# EAGLE board Tema_TSC (EAGLE 9.7.0)
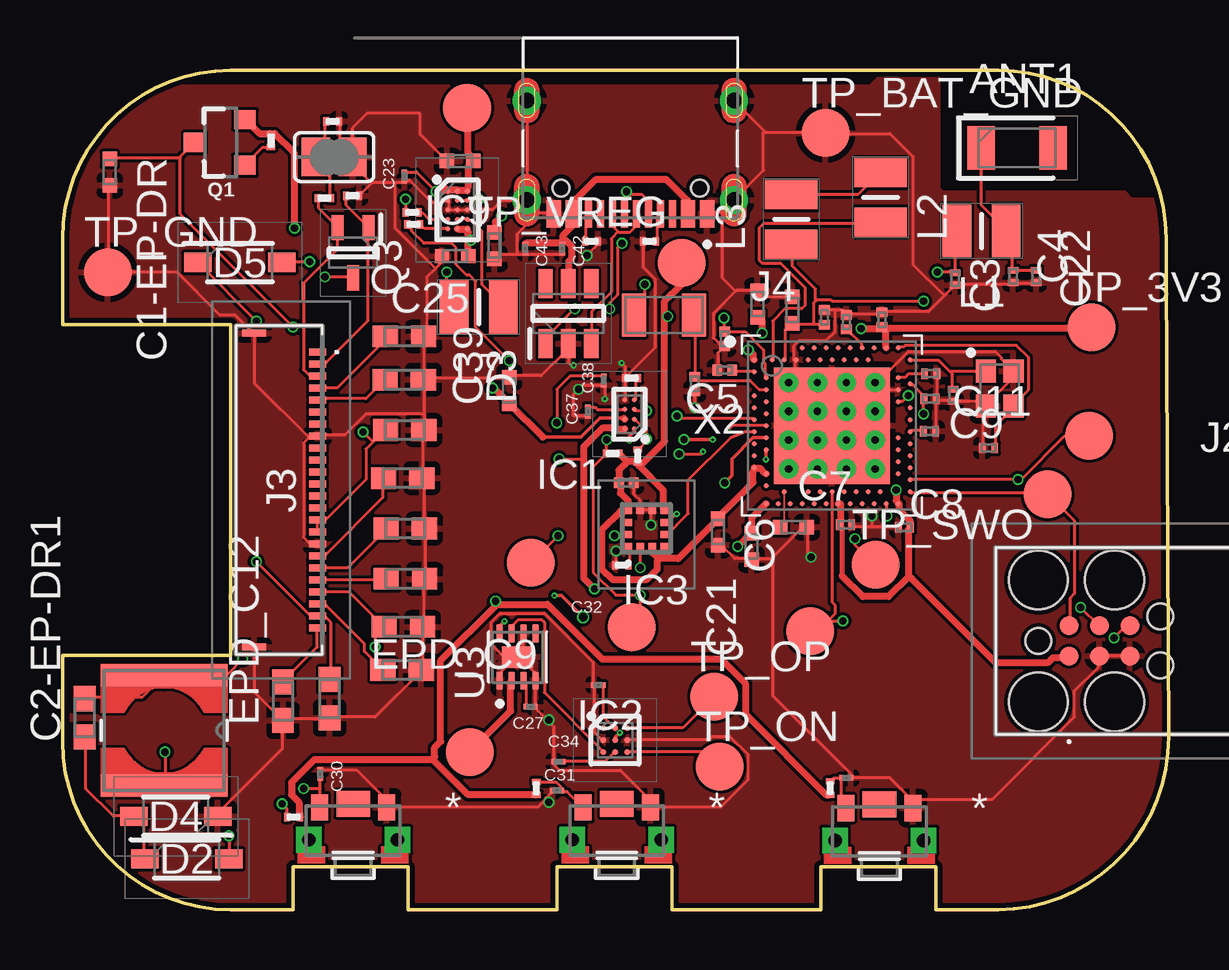
[diagram p0: board, top side]
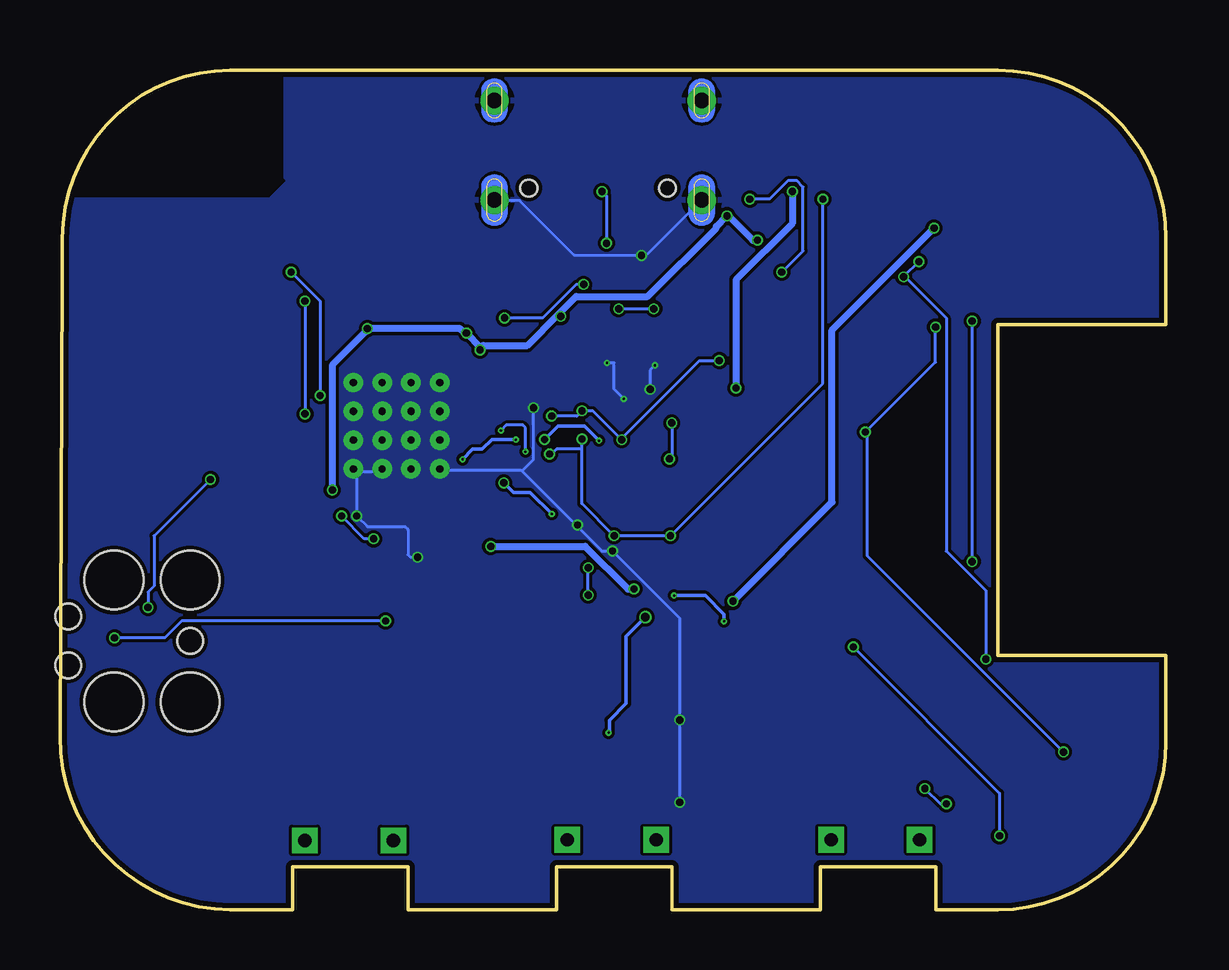
[diagram p1: board, bottom side, seen from below]

Size 46.1 x 35 mm. Coordinates in mm from the lower left corner, seen from the top.
Outline: 0,10.6 0,7 arc90 7,0 9.6,0 9.6,1.8 14.4,1.8 14.4,0 20.6,0 20.6,1.8 25.4,1.8 25.4,0 31.6,0 31.6,1.8 36.4,1.8 36.4,0 39,0 arc90 46.1,7.2 46,26.5 46,28 arc90 39,35 7,35 arc90 0,28 0,24.4 7,24.4 7,10.6 0,10.6
Copper layers (1*16): Top 0.035mm / dielectric 1.6mm / Bottom 0.035mm
Design rules "jlcpcb-2layers.dru *": minimum track width 5mil, minimum drill 0.3mm, track to track 5mil, track to pad 5mil, pad to pad 5mil, via to via 5mil, smd to smd 5mil, copper to edge 0.2mm, drill to drill 6mil, minimum pad ring 10mil, minimum via ring 3mil, stop-mask expansion 4mil, vias tented up to drill 0mil, thermal gap 10mil
Net classes: 1 traseedeputere: width 0.3 mm

## Footprints (pad centres in the part's own frame; a part is rotated, then mirrored left to right if it is on the bottom)
2450AT18B100E_ANTC3216X140N = smd 1.15 x 1.8: 1 -1.5,0; 2 1.5,0
NORDIC_NRF_3_RESC0201_L = smd 0.28 x 0.43: 1 -0.255,0; 2 0.255,0
NORDIC_NRF_3_RESC0402_N = smd 0.6 x 0.6: 1 -0.55,0; 2 0.55,0
NORDIC_NRF_3_RESC0603_N = smd 1.05 x 0.9: 1 -0.8,0; 2 0.8,0
NORDIC_NRF_3_RESC0201_N = smd 0.4 x 0.45: 1 -0.305,0; 2 0.305,0
GRM011R60J152KE01L_2_CAPC0201X13N = smd 0.22 x 0.23: 1 -0.185,0; 2 0.185,0
ESP32_C6_LIBRARY_5_SOD3716X135N = smd 1.15 x 0.8: 1 -1.75,0; 2 1.75,0
ESP32_C6_LIBRARY_3_SOT95P280X145-6N = smd 1.2 x 0.6: 1 -1.25,0.95; 2 -1.25,0; 3 -1.25,-0.95; 4 1.25,-0.95; 5 1.25,0; 6 1.25,0.95
BQ25180YBGR_BGA8C40P2X4_100X155X50 = smd 0.2 x 0.2: A1 -0.2,0.6; A2 0.2,0.6; B1 -0.2,0.2; B2 0.2,0.2; C1 -0.2,-0.2; C2 0.2,-0.2; D1 -0.2,-0.6; D2 0.2,-0.6
DRV2605YZFR_BGA9C50P3X3_144X144X62 = smd 0.25 x 0.25: A1 -0.5,0.5; A2 0,0.5; A3 0.5,0.5; B1 -0.5,0; B2 0,0; B3 0.5,0; C1 -0.5,-0.5; C2 0,-0.5; C3 0.5,-0.5
BMA423_BMA423 = smd 0.3 x 0.35: 1 -0.75,-0.775; 2 -0.25,-0.775; 3 0.25,-0.775; 4 0.75,-0.775; 7 0.75,0.775; 8 0.25,0.775; 9 -0.25,0.775; 10 -0.75,0.775 | smd 0.35 x 0.3: 5 0.775,-0.25; 6 0.775,0.25; 11 -0.775,0.25; 12 -0.775,-0.25
RT6160AWSC_BGA15C40P3X5_140X230X60 = smd 0.216 x 0.216: A1 -0.4,0.8; A2 0,0.8; A3 0.4,0.8; B1 -0.4,0.4; B2 0,0.4; B3 0.4,0.4; C1 -0.4,0; C2 0,0; C3 0.4,0; D1 -0.4,-0.4; D2 0,-0.4; D3 0.4,-0.4; E1 -0.4,-0.8; E2 0,-0.8; E3 0.4,-0.8
TC2030-IDC_TC2030IDC = smd 0.783 x 0.783: 1 -0.953,-0.635; 2 -0.953,0.635; 3 0.317,-0.635; 4 0.317,0.635; 5 1.588,-0.635; 6 1.588,0.635 | hole 2.451: -2.223,-2.54; -2.223,2.54; 0.952,-2.54; 0.952,2.54 | hole 1.067: -2.223,0; 2.857,-1.016; 2.857,1.016
503480-2400_5034802400 = smd 0.3 x 0.7: 1 -5.75,1.525; 2 -5.25,1.525; 3 -4.75,1.525; 4 -4.25,1.525; 5 -3.75,1.525; 6 -3.25,1.525; 7 -2.75,1.525; 8 -2.25,1.525; 9 -1.75,1.525; 10 -1.25,1.525; 11 -0.75,1.525; 12 -0.25,1.525; 13 0.25,1.525; 14 0.75,1.525; 15 1.25,1.525; 16 1.75,1.525; 17 2.25,1.525; 18 2.75,1.525; 19 3.25,1.525; 20 3.75,1.525; 21 4.25,1.525; 22 4.75,1.525; 23 5.25,1.525; 24 5.75,1.525 | smd 0.3 x 1: MP1 -6.54,-1.125; MP2 6.54,-1.125
KH-TYPE-C-16P_KINGHELM_KH-TYPE-C-16P = smd 0.6 x 1.15: A1_B12 -3.2,4.725; A4_B9 -2.4,4.725; A9_B4 2.4,4.725; A12_B1 3.2,4.725 | smd 0.3 x 1.15: A5 -1.25,4.725; A6 -0.25,4.725; A7 0.25,4.725; A8 1.25,4.725; B5 1.75,4.725; B6 0.75,4.725; B7 -0.75,4.725; B8 -1.75,4.725 | drill 0.65 pad 1.05: SH1 -4.32,0; SH2 4.32,0; SH3 -4.32,4.15; SH4 4.32,4.15 | hole 0.7: -2.89,3.65; 2.89,3.65
MLP2016SR47MT0S1_INDC2016X100N = smd 1.2 x 2.2: 1 -1.028,0; 2 1.028,0
ESP32_C6_LIBRARY_2_IND_4828-WE-TPC_WRE = smd 0.9 x 5.3: 1 -2.286,0; 2 2.286,0
ESP32_C6_LIBRARY_4_ESP32_C6_LIBRARY_4_ESP32_C6_LIBRARY_4_ESP32_C6_LIBRARY_4_ESP32_WROVER_SPARKFUN-DISCRETESEMI_SOT23-3 = smd 0.8 x 0.9: 1 -0.95,-1; 2 0.95,-1; 3 0,1.1
ESP32_C6_LIBRARY_6_SOT65P210X110-3N = smd 1.05 x 0.5: 1 -1.05,0.65; 2 -1.05,-0.65; 3 1.05,0
CPF0201D7K68C1_0201 = smd 0.35 x 0.25: 1 0,0.275; 2 0,-0.275
ERA-1AEB3401C_0201 = smd 0.35 x 0.25: 1 0,0.275; 2 0,-0.275
ESP32_C6_LIBRARY_7_JUMPER_SJ = smd 1.168 x 1.6: 1 -0.762,0; 2 0.762,0
2025-10-22_07-23-44_LIBRARY_SW_EVP-AKE31A_PAN = smd 0.711 x 1.092: 1 -1.4,-0.972; 2 1.4,-0.972 | drill 0.559 pad 0.914 square: 3 -1.848,0.381; 4 1.848,0.381 | smd 1.397 x 1.092: 5 0,-1.124
HECTOR_WATCH_1_TP20R = smd 2 x 2: TP 0,0
ESP32_C6_LIBRARY_SON50P200X200X80-9N = smd 0.76 x 0.27: 1 -0.985,0.75; 2 -0.985,0.25; 3 -0.985,-0.25; 4 -0.985,-0.75; 5 0.985,-0.75; 6 0.985,-0.25; 7 0.985,0.25; 8 0.985,0.75 | smd 0.9 x 1.3: 9 0,0
NORDIC_NRF_4_AQFN50P700X700X85_HS-74N = smd 4.85 x 4.85: P$74 0,0 | drill 0.3 pad 0.6: P$75 -1.8,1.8; P$76 -0.6,1.8; P$77 0.6,1.8; P$78 1.8,1.8; P$79 -1.8,0.6; P$80 -0.6,0.6; P$81 0.6,0.6; P$82 1.8,0.6; P$83 -1.8,-0.6; P$84 -0.6,-0.6; P$85 0.6,-0.6; P$86 1.8,-0.6; P$87 -1.8,-1.8; P$88 -0.6,-1.8; P$89 0.6,-1.8; P$90 1.8,-1.8 | smd 0.2 x 0.2: P$A8 -1.25,3.25; P$A10 -0.75,3.25; P$A12 -0.25,3.25; P$A14 0.25,3.25; P$A16 0.75,3.25; P$A18 1.25,3.25; P$A20 1.75,3.25; P$A22 2.25,3.25; P$A23 2.75,3.25; P$AA24 3.25,-2.25; P$AB2 -2.75,-2.5; P$AC5 -2,-2.75; P$AC9 -1,-2.75; P$AC11 -0.5,-2.75; P$AC13 0,-2.75; P$AC15 0.5,-2.75; P$AC17 1,-2.75; P$AC19 1.5,-2.75; P$AC21 2,-2.75; P$AC24 3.25,-2.75; P$AD2 -2.75,-3.25; P$AD4 -2.25,-3.25; P$AD6 -1.75,-3.25; P$AD8 -1.25,-3.25; P$AD10 -0.75,-3.25; P$AD12 -0.25,-3.25; P$AD14 0.25,-3.25; P$AD16 0.75,-3.25; P$AD18 1.25,-3.25; P$AD20 1.75,-3.25; P$AD22 2.25,-3.25; P$AD23 2.75,-3.25; P$B1 -3.25,2.75; P$B3 -2.5,2.75; P$B5 -2,2.75; P$B7 -1.5,2.75; P$B9 -1,2.75; P$B11 -0.5,2.75; P$B13 0,2.75; P$B15 0.5,2.75; P$B17 1,2.75; P$B19 1.5,2.75; P$B24 3.25,2.75; P$C1 -3.25,2.25; P$D2 -2.75,2; P$D23 2.75,2; P$E24 3.25,1.75; P$F2 -2.75,1.5; P$F23 2.75,1.5; P$G1 -3.25,1.25; P$H2 -2.75,1; P$H23 2.75,1; P$J1 -3.25,0.75; P$J24 3.25,0.75; P$K2 -2.75,0.5; P$L1 -3.25,0.25; P$L24 3.25,0.25; P$M2 -2.75,0; P$N1 -3.25,-0.25; P$N24 3.25,-0.25; P$P2 -2.75,-0.5; P$P23 2.75,-0.5; P$R1 -3.25,-0.75; P$R24 3.25,-0.75; P$T2 -2.75,-1; P$T23 2.75,-1; P$U1 -3.25,-1.25; P$U24 3.25,-1.25; P$V23 2.75,-1.5; P$W1 -3.25,-1.75; P$W24 3.25,-1.75; P$Y2 -2.75,-2; P$Y23 2.75,-2
NORDIC_NRF_BT-XTAL_2016_N = smd 0.95 x 0.85: 1 -0.725,-0.575; 2 0.725,-0.575; 3 0.725,0.575; 4 -0.725,0.575
NORDIC_NRF_1_XTAL_3215_N = smd 1 x 1.8: 1 -1.25,0; 2 1.25,0

## Placement (x,y rotation side)
ANT1  2450AT18B100E_2450AT18B100E  [2450AT18B100E_ANTC3216X140N]  39.78,31.76 0 top
C1  12pF  [NORDIC_NRF_3_RESC0201_L]  37.12,21.45 270 top
C1-EP-DR  10uF  [NORDIC_NRF_3_RESC0402_N]  1.97,30.75 270 top
C2  12pF  [NORDIC_NRF_3_RESC0201_L]  38.59,19.25 180 top
C2-EP-DR1  4.7u/25V  [NORDIC_NRF_3_RESC0603_N]  0.92,8.01 90 top
C3  1pF  [NORDIC_NRF_3_RESC0201_L]  37.2,26.3 270 top
C4  1pF  [NORDIC_NRF_3_RESC0201_L]  39.62,26.4 270 top
C5  100nF  [NORDIC_NRF_3_RESC0201_N]  27.6,22.5 180 top
C6  4.7µF  [NORDIC_NRF_3_RESC0402_N]  27.32,15.75 270 top
C7  100nF  [NORDIC_NRF_3_RESC0201_L]  32.64,16.05 0 top
C8  100nF  [NORDIC_NRF_3_RESC0201_L]  35.09,15.95 180 top
C9  820pF  [NORDIC_NRF_3_RESC0201_L]  36.14,19.95 0 top
C10  N.C.  [NORDIC_NRF_3_RESC0201_L]  36.16,21.3 0 top
C11  100pF  [NORDIC_NRF_3_RESC0201_L]  36.19,22.35 180 top
C12  100nF  [NORDIC_NRF_3_RESC0201_N]  34.15,24.6 90 top
C13  N.C  [NORDIC_NRF_3_RESC0201_N]  32.67,24.5 90 top
C14  4.7µF  [NORDIC_NRF_3_RESC0402_N]  28.97,25.25 90 top
C15  1.0µF  [NORDIC_NRF_3_RESC0402_N]  30.42,25.01 90 top
C16  47nF  [NORDIC_NRF_3_RESC0201_N]  31.75,24.7 90 top
C17  12pF  [NORDIC_NRF_3_RESC0201_N]  27.6,23.8 90 top
C18  12pF  [NORDIC_NRF_3_RESC0201_N]  26.35,21.92 90 top
C19  100nF  [NORDIC_NRF_3_RESC0201_N]  23.5,17.8 0 top
C20  4.7µF  [NORDIC_NRF_3_RESC0402_N]  30.47,15.95 0 top
C21  4.7µF  [NORDIC_NRF_3_RESC0402_N]  28.72,15.15 270 top
C22  N.C.  [NORDIC_NRF_3_RESC0201_L]  40.58,26.4 270 top
C23  0.1uF  [GRM011R60J152KE01L_2_CAPC0201X13N]  14.25,30.57 90 top
C24  10uF  [NORDIC_NRF_3_RESC0402_N]  16.57,31.21 0 top
C25  22uF  [NORDIC_NRF_3_RESC0402_N]  16.37,27.25 180 top
C27  0.1uF  [GRM011R60J152KE01L_2_CAPC0201X13N]  19.51,8.47 180 top
C29  1uF  [GRM011R60J152KE01L_2_CAPC0201X13N]  32.67,5.51 180 top
C30  1uF  [GRM011R60J152KE01L_2_CAPC0201X13N]  10.75,5.67 270 top
C31  1uF  [GRM011R60J152KE01L_2_CAPC0201X13N]  20.61,4.97 0 top
C32  1uF  [GRM011R60J152KE01L_2_CAPC0201X13N]  22.33,9.37 0 top
C33  22uF  [NORDIC_NRF_3_RESC0402_N]  18,27.69 270 top
C34  0.1uF  [GRM011R60J152KE01L_2_CAPC0201X13N]  20.67,6.17 0 top
C37  1uF  [GRM011R60J152KE01L_2_CAPC0201X13N]  21.89,20.77 90 top
C38  1uF  [GRM011R60J152KE01L_2_CAPC0201X13N]  22.55,22.07 90 top
C39  10uF  [NORDIC_NRF_3_RESC0402_N]  18.62,21.65 90 top
C42  0.1uF  [GRM011R60J152KE01L_2_CAPC0201X13N]  20.83,27.57 270 top
C43  4.7uF  [GRM011R60J152KE01L_2_CAPC0201X13N]  19.29,27.57 270 top
D2  MBR0530  [ESP32_C6_LIBRARY_5_SOD3716X135N]  5.18,2.13 0 top
D3  ESP32_C6_LIBRARY_3_USBLC6-2SC6Y  [ESP32_C6_LIBRARY_3_SOT95P280X145-6N]  21.08,24.86 90 top
D4  MBR0530  [ESP32_C6_LIBRARY_5_SOD3716X135N]  4.72,3.9 180 top
D5  MBR0530  [ESP32_C6_LIBRARY_5_SOD3716X135N]  7.39,26.99 0 top
EPD_C1  1uF/50V  [NORDIC_NRF_3_RESC0603_N]  14.24,22.1 180 top
EPD_C2  1uF/50V  [NORDIC_NRF_3_RESC0603_N]  14.25,23.9 180 top
EPD_C5  1uF/50V  [NORDIC_NRF_3_RESC0603_N]  14.26,20 180 top
EPD_C6  1uF/50V  [NORDIC_NRF_3_RESC0603_N]  14.18,18 180 top
EPD_C7  1uF/50V  [NORDIC_NRF_3_RESC0603_N]  14.28,15.9 180 top
EPD_C8  1uF/50V  [NORDIC_NRF_3_RESC0603_N]  14.29,13.8 180 top
EPD_C9  1uF/50V  [NORDIC_NRF_3_RESC0603_N]  14.2,11.8 180 top
EPD_C10  1uF/50V  [NORDIC_NRF_3_RESC0603_N]  14.15,10 180 top
EPD_C11  1uF/50V  [NORDIC_NRF_3_RESC0603_N]  11.13,8.8 90 top
EPD_C12  1uF/50V  [NORDIC_NRF_3_RESC0603_N]  9.19,8.7 90 top
IC1  BQ25180YBGR_BQ25180YBGR  [BQ25180YBGR_BGA8C40P2X4_100X155X50]  23.63,20.66 180 top
IC2  DRV2605YZFR_DRV2605YZFR  [DRV2605YZFR_BGA9C50P3X3_144X144X62]  23.03,7.08 0 top
IC3  BMA423_BMA423  [BMA423_BMA423]  24.33,15.9 0 top
IC9  RT6160AWSC_RT6160AWSC  [RT6160AWSC_BGA15C40P3X5_140X230X60]  16.46,29.18 0 top
J2  TC2030-IDC_TC2030-IDC  [TC2030-IDC_TC2030IDC]  42.9,11.21 0 top
J3  503480-2400_503480-2400  [503480-2400_5034802400]  9.1,17.5 270 top
J4  KH-TYPE-C-16P_KH-TYPE-C-16P  [KH-TYPE-C-16P_KINGHELM_KH-TYPE-C-16P]  23.67,33.74 180 top
L1  3.9nH  [MLP2016SR47MT0S1_INDC2016X100N]  38.3,28.3 0 top
L2  10µH  [MLP2016SR47MT0S1_INDC2016X100N]  34.1,29.7 90 top
L3  15nH  [MLP2016SR47MT0S1_INDC2016X100N]  30.37,28.78 270 top
L5  68uH  [ESP32_C6_LIBRARY_2_IND_4828-WE-TPC_WRE]  4.23,7.49 270 top
L7  MLP2016SR47MT0S1_FTC252012SR47MBCA  [MLP2016SR47MT0S1_INDC2016X100N]  17.34,25.12 0 top
Q1  20V/4.2A/52mΩ/1.4W  [ESP32_C6_LIBRARY_4_ESP32_C6_LIBRARY_4_ESP32_C6_LIBRARY_4_ESP32_C6_LIBRARY_4_ESP32_WROVER_SPARKFUN-DISCRETESEMI_SOT23-3]  6.6,31.99 90 top
Q3  SI1308EDL-T1-GE3  [ESP32_C6_LIBRARY_6_SOT65P210X110-3N]  12.11,27.39 270 top
R1_EP_DR  0.47  [CPF0201D7K68C1_0201]  10.91,29.67 270 top
R1_USB  5k1  [ERA-1AEB3401C_0201]  24.47,27.87 90 top
R2  0  [CPF0201D7K68C1_0201]  14.63,28.57 90 top
R2_EP_DR  10k  [CPF0201D7K68C1_0201]  12.09,29.77 270 top
R2_USB  5k1  [ERA-1AEB3401C_0201]  22.05,27.87 90 top
R3  0  [CPF0201D7K68C1_0201]  23.31,14.37 90 top
R4  0  [CPF0201D7K68C1_0201]  14.57,29.07 90 top
R5  10k  [CPF0201D7K68C1_0201]  9.63,3.87 90 top
R7  10k  [CPF0201D7K68C1_0201]  31.99,5.07 0 top
R8  10k  [CPF0201D7K68C1_0201]  19.75,5.07 0 top
R9  10K  [CPF0201D7K68C1_0201]  23.71,22.17 90 top
R17  3K3  [CPF0201D7K68C1_0201]  23.97,18.92 180 top
R18  3K3  [CPF0201D7K68C1_0201]  22.93,19.02 270 top
R_PWR_EPD  10K  [CPF0201D7K68C1_0201]  8.69,32.07 180 top
R_TYPE_SEL  2.2  [CPF0201D7K68C1_0201]  11.25,32.87 270 top
SJ1  [ESP32_C6_LIBRARY_7_JUMPER_SJ]  11.32,31.38 180 top
SW_DN  2025-10-22_07-23-44_LIBRARY_EVP-AKE31ASW_EVP-AKE31A_PAN  [2025-10-22_07-23-44_LIBRARY_SW_EVP-AKE31A_PAN]  34.05,3.27 180 top
SW_ENT  2025-10-22_07-23-44_LIBRARY_EVP-AKE31ASW_EVP-AKE31A_PAN  [2025-10-22_07-23-44_LIBRARY_SW_EVP-AKE31A_PAN]  23.1,3.3 180 top
SW_UP  2025-10-22_07-23-44_LIBRARY_EVP-AKE31ASW_EVP-AKE31A_PAN  [2025-10-22_07-23-44_LIBRARY_SW_EVP-AKE31A_PAN]  12.11,3.3 180 top
TP_3.3V  HECTOR_WATCH_1_TPTP20R  [HECTOR_WATCH_1_TP20R]  25.8,26.98 0 top
TP_3V3  HECTOR_WATCH_1_TPTP20R  [HECTOR_WATCH_1_TP20R]  42.9,24.28 0 top
TP_BAT_GND  HECTOR_WATCH_1_TPTP20R  [HECTOR_WATCH_1_TP20R]  31.8,32.38 0 top
TP_GND  HECTOR_WATCH_1_TPTP20R  [HECTOR_WATCH_1_TP20R]  1.89,26.58 0 top
TP_ON  HECTOR_WATCH_1_TPTP20R  [HECTOR_WATCH_1_TP20R]  27.38,5.97 0 top
TP_OP  HECTOR_WATCH_1_TPTP20R  [HECTOR_WATCH_1_TP20R]  27.16,8.88 0 top
TP_RESET  HECTOR_WATCH_1_TPTP20R  [HECTOR_WATCH_1_TP20R]  31.17,11.62 0 top
TP_SCL  HECTOR_WATCH_1_TPTP20R  [HECTOR_WATCH_1_TP20R]  19.52,14.48 0 top
TP_SDA  HECTOR_WATCH_1_TPTP20R  [HECTOR_WATCH_1_TP20R]  23.72,11.78 0 top
TP_SWDCLK  HECTOR_WATCH_1_TPTP20R  [HECTOR_WATCH_1_TP20R]  42.78,19.76 0 top
TP_SWDIO  HECTOR_WATCH_1_TPTP20R  [HECTOR_WATCH_1_TP20R]  41.05,17.33 0 top
TP_SWO  HECTOR_WATCH_1_TPTP20R  [HECTOR_WATCH_1_TP20R]  33.89,14.38 0 top
TP_VBAT  HECTOR_WATCH_1_TPTP20R  [HECTOR_WATCH_1_TP20R]  16.98,6.58 0 top
TP_VREG  HECTOR_WATCH_1_TPTP20R  [HECTOR_WATCH_1_TP20R]  16.86,33.43 0 top
U3  ESP32_C6_LIBRARY_MAX17048G+T10  [ESP32_C6_LIBRARY_SON50P200X200X80-9N]  18.97,10.54 90 top
U$1  NORDIC_NRF_4_NRF52840_QF  [NORDIC_NRF_4_AQFN50P700X700X85_HS-74N]  32.07,20.18 0 top
X1  32MHz  [NORDIC_NRF_BT-XTAL_2016_N]  39.06,21.73 270 top
X2  32.768kHz  [NORDIC_NRF_1_XTAL_3215_N]  25.07,24.8 180 top

## Library data of the parts
ANT1 = InkTime_v5; ARROW_PART_NUMBER: 2450AT18B100E; ARROW_PRICE-STOCK: https://www.arrow.com/en/products/2450at18b100e/johanson-dielectrics?utm_currency=USD&region=nac; DESCRIPTION: Antennas 2.45GHz ANTENNA; HEIGHT: 1.4mm; MANUFACTURER_NAME: JOHANSON TECHNOLOGY; MANUFACTURER_PART_NUMBER: 2450AT18B100E; MOUSER_PART_NUMBER: 609-2450AT18B100E; MOUSER_PRICE-STOCK: https://www.mouser.co.uk/ProductDetail/Johanson-Technology/2450AT18B100E?qs=yCnrNFeXz%252Bh5MFsFIXGZGA%3D%3D
C1 C1-EP-DR C2 C2-EP-DR1 C3-C22 C24 C25 C33 C39 EPD_C1 EPD_C2 EPD_C5-EPD_C12 R1_EP_DR R1_USB R2 R2_EP_DR R2_USB R3-R5 R7-R9 R17 R18 R_PWR_EPD R_TYPE_SEL SJ1 TP_3.3V TP_3V3 TP_BAT_GND TP_GND TP_ON TP_OP TP_RESET TP_SCL TP_SDA TP_SWDCLK TP_SWDIO TP_SWO TP_VBAT TP_VREG U$1 X1 X2 = InkTime_v5
C23 C27 C29-C32 C34 C37 C38 C42 C43 = InkTime_v5; AVAILABILITY: In Stock; CHECK_PRICES: https://www.snapeda.com/parts/GRM011R60J152KE01L/Murata/view-part/?ref=eda; DESCRIPTION: SMD Capacitor X5R(EIA) with Capacitance: 1500pF Tol. 10%. Rated Voltage: 6.3Vdc; MF: Murata; MP: GRM011R60J152KE01L; PACKAGE: 0201 Murata; PRICE: None; SNAPEDA_LINK: https://www.snapeda.com/parts/GRM011R60J152KE01L/Murata/view-part/?ref=snap
D2 D4 D5 = InkTime_v5; AVAILABILITY: In Stock; CHECK_PRICES: https://www.snapeda.com/parts/MBR0530/Onsemi/view-part/?ref=eda; DESCRIPTION: Diode Schottky 30 V 500mA Surface Mount SOD-123; MF: ON Semiconductor; MP: MBR0530; PACKAGE: SOD-123-2 ON Semiconductor; PRICE: None; PURCHASE-URL: https://www.snapeda.com/api/url_track_click_mouser/?unipart_id=179458&manufacturer=ON Semiconductor&part_name=MBR0530&search_term=None; SNAPEDA_LINK: https://www.snapeda.com/parts/MBR0530/Onsemi/view-part/?ref=snap
D3 = InkTime_v5; AVAILABILITY: In Stock; CHECK_PRICES: https://www.snapeda.com/parts/USBLC6-2SC6Y/STMicroelectronics/view-part/?ref=eda; DESCRIPTION: 17V Clamp 5A (8/20µs) Ipp Tvs Diode Surface Mount SOT-23-6; MF: STMicroelectronics; MP: USBLC6-2SC6Y; PACKAGE: SOT-23-6 STMicroelectronics; PRICE: None; SNAPEDA_LINK: https://www.snapeda.com/parts/USBLC6-2SC6Y/STMicroelectronics/view-part/?ref=snap
IC1 = InkTime_v5; ARROW_PART_NUMBER: BQ25180YBGR; ARROW_PRICE-STOCK: https://www.arrow.com/en/products/bq25180ybgr/texas-instruments?utm_currency=USD&region=nac; DESCRIPTION: Charger IC Lithium Ion/Polymer, Lithium Iron Phosphate 8-DSBGA (1.6x1.1); HEIGHT: 0.5mm; MANUFACTURER_NAME: Texas Instruments; MANUFACTURER_PART_NUMBER: BQ25180YBGR; MOUSER_PART_NUMBER: 595-BQ25180YBGR; MOUSER_PRICE-STOCK: https://www.mouser.co.uk/ProductDetail/Texas-Instruments/BQ25180YBGR?qs=doiCPypUmgEWjAK%252BJAX6Tw%3D%3D
IC2 = InkTime_v5; ARROW_PART_NUMBER: DRV2605YZFR; ARROW_PRICE-STOCK: https://www.arrow.com/en/products/drv2605yzfr/texas-instruments?region=nac; DESCRIPTION: Haptic Driver for ERM/LRA with Built-In Library and Smart Loop Architecture; HEIGHT: 0.625mm; MANUFACTURER_NAME: Texas Instruments; MANUFACTURER_PART_NUMBER: DRV2605YZFR
IC3 = InkTime_v5; ARROW_PART_NUMBER: BMA423; ARROW_PRICE-STOCK: https://www.arrow.com/en/products/bma423/bosch; DESCRIPTION: Accelerometers Triaxial low-g 12bit Acceleration Sensor; HEIGHT: 1mm; MANUFACTURER_NAME: BOSCH; MANUFACTURER_PART_NUMBER: BMA423; MOUSER_PART_NUMBER: 262-BMA423; MOUSER_PRICE-STOCK: https://www.mouser.co.uk/ProductDetail/Bosch-Sensortec/BMA423?qs=HXFqYaX1Q2xC%252BSgeGoX3mg%3D%3D
IC9 = InkTime_v5; DESCRIPTION: Buck-Boost Regulator Positive Output Step-Up/Step-Down I2C DC-DC Controller IC 15-WL-CSP (BSC) (1.4x2.3); HEIGHT: 0.6mm; MANUFACTURER_NAME: RICHTEK; MANUFACTURER_PART_NUMBER: RT6160AWSC; MOUSER_PART_NUMBER: 835-RT6160AWSC; MOUSER_PRICE-STOCK: https://www.mouser.co.uk/ProductDetail/Richtek/RT6160AWSC?qs=amGC7iS6iy%2FLd9PSoixZXQ%3D%3D
J2 = InkTime_v5; DESCRIPTION: CABLE ADAPTER 6 POS; HEIGHT: 19mm; MANUFACTURER_NAME: Tag Connect; MANUFACTURER_PART_NUMBER: TC2030-IDC
J3 = InkTime_v5; DESCRIPTION: FFC & FPC Connectors 0.5mm FPC RA SMT Dual Contact 24Ckt; HEIGHT: 1.87mm; MANUFACTURER_NAME: Molex; MANUFACTURER_PART_NUMBER: 503480-2400; MOUSER_PART_NUMBER: 538-503480-2400; MOUSER_PRICE-STOCK: https://www.mouser.co.uk/ProductDetail/Molex/503480-2400?qs=OAhjpuo3Vu7efIoxFh9AOw%3D%3D
J4 = InkTime_v5; AVAILABILITY: Not in stock; CHECK_PRICES: https://www.snapeda.com/parts/KH-TYPE-C-16P/Kinghelm/view-part/?ref=eda; MF: kinghelm; MP: KH-TYPE-C-16P; PACKAGE: None; PRICE: None; SNAPEDA_LINK: https://www.snapeda.com/parts/KH-TYPE-C-16P/Kinghelm/view-part/?ref=snap
L1-L3 L7 = InkTime_v5; DESCRIPTION: SMD / SMT Inductors (Coils), L=0.47?H, L x W x T :; HEIGHT: 1mm; JLCPCB: https://jlcpcb.com/partdetail/6763488-FTC252012SR47MBCA/C5832368; MANUFACTURER_NAME: TDK; MANUFACTURER_PART_NUMBER: FTC252012SR47MBCA
L5 = InkTime_v5; COPYRIGHT: Copyright (C) 2024 Ultra Librarian. All rights reserved.; MANUFACTURER_PART_NUMBER: 744043680; MFR_NAME: Wurth Electronics
Q1 = InkTime_v5; PROD_ID: TRAN-14388
Q3 = InkTime_v5; AVAILABILITY: In Stock; CHECK_PRICES: https://www.snapeda.com/parts/SI1308EDL-T1-GE3/Vishay+Siliconix/view-part/?ref=eda; DESCRIPTION: Si1308EDL-T1-GE3 N-channel MOSFET Transistor, 1.5 A, 30 V, 3-Pin SC-70 | Siliconix / Vishay SI1308EDL-T1-GE3; MF: Vishay Siliconix; MP: SI1308EDL-T1-GE3; PACKAGE: SOT-323 Vishay Semiconductor; PRICE: None; PURCHASE-URL: https://www.snapeda.com/api/url_track_click_mouser/?unipart_id=274603&manufacturer=Vishay Siliconix&part_name=SI1308EDL-T1-GE3&search_term=None; SNAPEDA_LINK: https://www.snapeda.com/parts/SI1308EDL-T1-GE3/Vishay+Siliconix/view-part/?ref=snap
SW_DN SW_ENT SW_UP = InkTime_v5; COPYRIGHT: Copyright (C) 2025 Ultra Librarian. All rights reserved.; DIGI-KEY_PART_NUMBER_1: P123437TR-ND; DIGI-KEY_PART_NUMBER_2: P123437CT-ND; DIGI-KEY_PART_NUMBER_3: P123437DKR-ND; MANUFACTURER_NAME: Panasonic; MANUFACTURER_PART_NUMBER: EVP-AKE31A
U3 = InkTime_v5; AVAILABILITY: In Stock; CHECK_PRICES: https://www.snapeda.com/parts/MAX17048G+T10/Analog+Devices/view-part/?ref=eda; DESCRIPTION: 3µA 1-Cell/2-Cell Fuel Gauge with ModelGauge; MF: Analog Devices; MP: MAX17048G+T10; PACKAGE: TDFN-8 Maxim; PRICE: None; PURCHASE-URL: https://www.snapeda.com/api/url_track_click_mouser/?unipart_id=329239&manufacturer=Analog Devices&part_name=MAX17048G+T10&search_term=None; SNAPEDA_LINK: https://www.snapeda.com/parts/MAX17048G+T10/Analog+Devices/view-part/?ref=snap

## Nets
3V3/1.7D [traseedeputere]: Q1.2 R5.2 R7.2 R8.2 R_PWR_EPD.2
3V3/2.4A [traseedeputere]: C6.1 C7.1 C8.1 C12.1 C14.1 C19.1 C25.1 C33.1 IC3.3 IC3.7 IC3.10 IC9.E2 IC9.E3 J2.1 R17.1 R18.1 TP_3.3V.TP TP_3V3.TP U$1.P$A22 U$1.P$AD14 U$1.P$AD23 U$1.P$B1 U$1.P$W1 U$1.P$Y2
ALERT/1.6C: U3.5
ALERT/2.5C: U$1.P$J24
D+/1.5D: D3.4
D+/2.7D: U$1.P$AD6
D-/1.5D: D3.6
D-/2.7D: U$1.P$AD4
DEC3: C11.2 U$1.P$D23
DEC4_6: C10.1 C15.1 C16.1 L3.2 U$1.P$B5 U$1.P$E24
DN: D3.1 J4.A7 J4.B7
DP: D3.3 J4.A6 J4.B6
EPD_3V3: C1-EP-DR.1 EPD_C5.2 J3.15 J3.16 L5.2 Q1.3
EPD_BUSY/1.5D: J3.9
EPD_BUSY/2.2D: U$1.P$AD12
EPD_CS/1.4C: J3.12
EPD_CS/2.2D: U$1.P$K2
EPD_DC/1.5D: J3.11
EPD_DC/2.2D: U$1.P$AD10
EPD_RST/1.5D: J3.10
EPD_RST/2.2D: U$1.P$AC11
GDR: J3.2 Q3.1 R2_EP_DR.2
GND: C1-EP-DR.2 C1.2 C2.2 C3.2 C4.2 C5.2 C6.2 C7.2 C8.2 C9.2 C10.2 C11.1 C12.2 C13.2 C14.2 C15.2 C16.2 C17.1 C18.1 C19.2 C20.2 C21.2 C22.2 C23.1 C24.1 C25.2 C27.1 C29.1 C30.1 C31.1 C32.1 C33.2 C34.1 C37.1 C38.1 C39.2 C42.2 C43.2 D3.2 D4.1 EPD_C1.1 EPD_C2.1 EPD_C5.1 EPD_C6.1 EPD_C7.1 EPD_C8.1 EPD_C9.1 EPD_C10.1 EPD_C11.1 EPD_C12.1 IC1.D2 IC2.B1 IC2.B3 IC3.8 IC3.9 IC9.B1 IC9.C1 IC9.C2 IC9.C3 J2.3 J2.5 J3.8 J3.17 J3.MP1 J3.MP2 J4.A1_B12 J4.A12_B1 J4.SH1 J4.SH2 J4.SH3 J4.SH4 R1_USB.1 R2_EP_DR.1 R2_USB.2 R3.1 R9.1 R_TYPE_SEL.1 SJ1.1 SW_DN.1 SW_ENT.1 SW_UP.1 TP_BAT_GND.TP TP_GND.TP U3.1 U3.4 U3.6 U3.9 U$1.P$74 U$1.P$75 U$1.P$76 U$1.P$77 U$1.P$78 U$1.P$79 U$1.P$80 U$1.P$81 U$1.P$82 U$1.P$83 U$1.P$84 U$1.P$85 U$1.P$86 U$1.P$87 U$1.P$88 U$1.P$89 U$1.P$90 U$1.P$B7 U$1.P$F23 X1.2 X1.4
HAPTIC_EN/1.4C: IC2.A1
HAPTIC_EN/2.6A: U$1.P$U1
IMU_INT1: IC3.5 U$1.P$N1
IMU_INT2: IC3.6 U$1.P$P2
LX1: IC9.B2 IC9.B3 L7.1
LX2: IC9.D2 IC9.D3 L7.2
MOSI/1.5B: J3.14
MOSI/2.2D: U$1.P$B13
N$1: C2.1 U$1.P$A23 X1.3
N$2: C1.1 U$1.P$B24 X1.1
N$3: C3.1 L1.1 U$1.P$H23
N$4: L2.1 U$1.P$B3
N$5: L2.2 L3.1
N$6: ANT1.1 C4.1 C22.1 L1.2
N$7: C20.1 U$1.P$AC5
N$8: C5.1 U$1.P$C1
N$9: C17.2 U$1.P$D2 X2.2
N$10: C18.2 U$1.P$F2 X2.1
N$11: C13.1 U$1.P$A18
N$12: IC9.D1 R4.2
N$13: IC9.E1 R2.2
N$14: IC1.D1 R9.2
N$15: IC3.1 R3.2
N$16: C2-EP-DR1.1 D2.1 D4.2
N$17: C2-EP-DR1.2 D5.2 L5.1 Q3.3
N$18: C34.2 IC2.C2
N$19: C9.1 U$1.P$N24
N$20: C32.2 IC2.A2
N$21: J4.A5 R1_USB.2
N$22: R1_EP_DR.1 R_TYPE_SEL.2 SJ1.2
N$23: C27.2 U3.3
N$26: J4.B5 R2_USB.1
N$27: EPD_C2.2 J3.4
N$28: EPD_C1.2 J3.5
N$35: EPD_C6.2 J3.18
N$36: EPD_C7.2 J3.19
N$38: EPD_C8.2 J3.20
N$40: EPD_C10.2 J3.22
N$42: EPD_C12.2 J3.24
OUT+: IC2.A3 TP_OP.TP
OUT-: IC2.C3 TP_ON.TP
P0.04: U$1.P$J1
P0.09: U$1.P$L24
P0.13/1.5D: C30.2 R5.1 SW_UP.2
P0.13/2.6C: U$1.P$AD8
P0.14/1.5D: C31.2 R8.1 SW_ENT.2
P0.14/2.7C: U$1.P$AC9
P0.19: U$1.P$AC15
P0.20: U$1.P$AD16
P0.21: U$1.P$AC17
P0.22: U$1.P$AD18
P0.23: U$1.P$AC19
P0.24: U$1.P$AD20
P0.25: U$1.P$AC21
P0.26: U$1.P$G1
P0.27: U$1.P$H2
P0.28: U$1.P$B11
P0.29: U$1.P$A10
P0.30: U$1.P$B9
P0.31: U$1.P$A8
P1.01/1.6C: Q1.1 R_PWR_EPD.1
P1.01/2.4B: U$1.P$Y23
P1.02/1.6C: C29.2 R7.1 SW_DN.2
P1.02/2.8C: U$1.P$W24
P1.03: U$1.P$V23
P1.04: U$1.P$U24
P1.05: U$1.P$T23
P1.06: U$1.P$R24
P1.07: U$1.P$P23
P1.09: U$1.P$R1
P1.10: U$1.P$A20
P1.11: U$1.P$B19
P1.12: U$1.P$B17
P1.13: U$1.P$A16
P1.14: U$1.P$B15
P1.15: U$1.P$A14
PMIC_INT: IC1.A1 U$1.P$T2
PREVGH: D5.1 EPD_C11.2 J3.23
PREVGL: D2.2 EPD_C9.2 J3.21
RESE: J3.3 Q3.2 R1_EP_DR.2
RESET: J2.6 TP_RESET.TP U$1.P$AC13
SCK/1.5B: J3.13
SCK/2.2D: U$1.P$A12
SCL/1.4C: IC2.C1 U3.7
SCL/2.4C: IC1.B1 IC3.12 R4.1 R17.2 TP_SCL.TP U$1.P$M2
SDA/1.4C: IC2.B2 U3.8
SDA/2.4C: IC1.C1 IC3.2 R2.1 R18.2 TP_SDA.TP U$1.P$L1
SWDCLK: J2.4 TP_SWDCLK.TP U$1.P$AA24
SWDIO: J2.2 TP_SWDIO.TP U$1.P$AC24
SWO: TP_SWO.TP U$1.P$AD22
VBAT/1.2A [traseedeputere]: TP_VBAT.TP U3.2
VBAT/2.5C [traseedeputere]: C37.2 IC1.C2
VBUS/1.5D [traseedeputere]: C42.1 C43.1 D3.5 J4.A4_B9 J4.A9_B4
VBUS/2.6D [traseedeputere]: C21.1 C38.2 IC1.A2 U$1.P$AD2
VREG [traseedeputere]: C23.2 C24.2 C39.1 IC1.B2 IC9.A1 IC9.A2 IC9.A3 TP_VREG.TP

## Tracks (layer width: path | path; a pad name or v marks a point on that pad's centre or on a via)
3V3/1.7D  (via drill 0.3)
  Top 0.3: Q1.2 7.63,32.93 8.2,32.36 8.65,32.36 R_PWR_EPD.2 8.84,32.36 9.66,31.53 v9.66,28.42 | 15.44,6.26 10.49,6.26 9.54,5.31 9.54,4.8 9.86,4.48 9.86,3.91 R5.2 | 15.44,6.26 16.9,4.8 19.7,4.8 R8.2 | 18.11,12.74 20.21,12.74 22.49,10.45 27.45,10.45 28.46,9.44 28.46,8.16 31.83,4.8 31.95,4.8 R7.2 | 18.11,12.74 15.76,10.39 15.76,7.02 15.51,6.77 15.51,6.39 15.44,6.26 | v18.05,12.86 18.11,12.74
  Bottom 0.3: v9.66,28.42 13.92,24.17 13.92,16.99 v18.05,12.86
3V3/2.4A  (via drill 0.3)
  Top 0.2: C7.1 32.48,15.95 32.48,13.92
  Top 0.3: 23.51,18.71 23.95,18.71 R17.1 | 23.51,18.71 23.25,18.96 R18.1 | IC3.7 25.03,16.74 25.03,17.5 24.02,18.52 R17.1 | 23.51,18.71 23.45,18.58 23.19,18.33 23.19,17.95 C19.1 23.25,17.75 23.25,17.37 23.57,17.05 23.57,16.74 IC3.10 23.45,16.61 23.25,16.61 22.49,15.85 22.49,14.2 22.94,13.75 24.33,13.75 24.78,14.2 24.78,14.52 24.84,14.64 | 28.84,18.39 29.1,18.39 29.29,18.2 U$1.P$Y2 | 28.84,18.39 U$1.P$W1 | 24.84,14.64 24.59,14.9 24.59,15.09 IC3.3 | 24.84,14.64 25.67,14.64 C6.1 27.38,16.42 28.78,17.82 28.78,18.26 28.84,18.39 | 25.09,24.74 25.09,19.53 24.14,18.58 R17.1 | 25.09,24.74 25.09,25.37 25.79,26.07 25.79,26.96 TP_3.3V.TP | C7.1 32.43,16.1 32.43,16.92 U$1.P$AD14 | 32.48,13.92 33.35,13.05 34.43,13.05 35.26,13.88 | 35.26,13.88 35.26,15.85 C8.1 35.32,15.98 35.32,16.23 34.87,16.67 34.87,16.93 U$1.P$AD23 34.75,17.05 v34.75,17.5 | J2.1 41.92,10.52 41.29,10.52 41.1,10.32 38.88,10.32 35.38,13.82 35.26,13.88 | 34.3,24.17 34.3,23.47 U$1.P$A22 | 34.3,24.17 34.18,24.3 C12.1 34.05,24.23 v33.29,24.23 | 34.3,24.17 34.43,24.23 42.88,24.23 TP_3V3.TP | 16.84,28.36 16.52,28.36 IC9.E2 | 16.84,28.36 IC9.E3 | 16.9,27.91 16.9,27.28 C25.1 | 16.9,27.91 16.9,28.23 16.84,28.36 | v28.59,23.34 28.78,23.15 28.78,22.96 U$1.P$B1 | v29.16,24.04 29.16,24.55 29.03,24.68 C14.1 | v18.3,28.93 18.05,28.68 18.05,28.3 C33.1 | v17.03,27.91 16.9,27.91 | v25.22,24.74 25.09,24.74
  Bottom 0.3: 25.32,24.83 26.62,23.53 28.46,23.53 v28.59,23.34 28.59,23.47 v29.16,24.04 29.29,24.1 29.41,24.23 v33.29,24.23 33.35,24.1 34.75,22.71 v34.75,17.5 | 25.32,24.83 24.59,25.56 21.6,25.56 18.75,28.42 18.75,28.49 v18.3,28.93 18.17,28.87 17.22,27.91 v17.03,27.91 | v25.22,24.74 25.32,24.83
DEC3
  Top 0.127: U$1.P$D23 34.87,22.2 35.13,22.2 35.26,22.33 35.89,22.33 C11.2
DEC4_6  (via drill 0.3)
  Top 0.127: U$1.P$E24 35.38,21.88 35.45,21.88 35.89,21.44 C10.1 35.89,21.25 v35.89,20.68 | U$1.P$B5 30.11,22.96 30.11,24.17 30.37,24.42 C15.1 30.43,24.42 31.32,24.42 | 31.32,24.42 31.7,24.42 C16.1 | v35.89,25.37 32.08,25.37 32.02,25.44 31.45,25.44 31.41,25.41 | 31.41,25.41 31.32,25.31 31.32,24.42 | L3.2 30.43,27.72 30.43,26.84 31.38,25.88 31.38,25.44 31.41,25.41
  Bottom 0.127: v35.89,25.37 v35.89,20.68
DN  (via drill 0.3)
  Top 0.127: 23.67,29.79 23.7,29.82 24.14,29.82 24.4,29.56 24.4,29.06 J4.B7 | 23.67,29.79 23.45,29.56 23.45,29.06 J4.A7 | v21.35,25.06 20.14,23.85 20.14,23.66 D3.1 | v22.81,25.06 22.81,25.31 23.13,25.63 23.13,27.6 v23.32,27.79 | 23.67,29.79 v23.51,29.95
  Bottom 0.127: v22.81,25.06 v21.35,25.06 | v23.32,27.79 23.32,29.76 v23.51,29.95
DP
  Top 0.127: 23.16,28.26 23.19,28.23 23.64,28.23 23.89,28.49 23.89,28.99 J4.A6 | 23.16,28.26 22.94,28.49 22.94,28.99 J4.B6 | 23.16,28.26 22.87,27.98 22.87,25.76 22.05,24.93 22.05,23.66 D3.3
EPD_3V3  (via drill 0.3)
  Top 0.127: 4.87,31.38 5.47,31.98 Q1.3 | 4.87,31.38 4.84,31.34 1.98,31.34 C1-EP-DR.1 | J3.16 10.62,15.79 10.62,16.23 J3.15 10.68,16.29 11,16.29 12.65,17.95 12.65,19.21 12.94,19.5 | 12.94,19.5 13.41,19.98 EPD_C5.2 | v9.6,24.3 4.9,28.99 4.9,31.34 4.87,31.38 | 12.94,19.5 v12.52,19.91 | v4.27,6.58 4.27,5.24 L5.2
  Bottom 0.127: v9.6,24.3 9.6,22.83 v12.52,19.91 12.46,19.91 12.46,14.77 v4.27,6.58
GDR
  Top 0.127: R2_EP_DR.2 11.82,29.76 11.82,29.37 12.71,28.49 Q3.1 12.71,28.42 12.71,24.55 10.94,22.77 10.68,22.77 J3.2
GND  (via drill 0.1, 0.3)
  Top 0.127: C6.2 27.38,15.15 27.51,15.15 28.02,14.64 28.71,14.64 C21.2 28.78,14.64 29.54,14.64 29.57,14.67 | 29.57,14.67 30.81,15.91 31,15.91 C20.2 31.06,15.98 31.06,14.84 v31.2,14.7 | J2.5 44.46,10.58 43.26,10.58 J2.3 43.19,10.52 43.19,10.13 42.18,9.12 42.18,8.04 38.75,4.61 35.45,4.61 SW_DN.1 35.45,4.29 35.45,4.55 34.49,5.5 32.91,5.5 C29.1 32.84,5.56 32.84,5.69 29.6,8.93 29.6,14.64 29.57,14.67 | 32.21,24.99 32.52,24.99 32.65,24.87 C13.2 32.72,24.87 34.11,24.87 C12.2 34.18,24.93 36.08,24.93 36.75,25.6 | 32.21,24.99 31.76,24.99 C16.2 | C22.2 40.53,26.14 39.64,26.14 C4.2 39.57,26.14 39.51,26.07 37.22,26.07 C3.2 37.16,26.01 36.75,25.6 | C9.2 36.4,19.98 36.4,21.25 C10.2 | C11.1 36.46,22.33 36.46,21.31 C10.2 | C10.2 36.46,21.25 37.1,21.25 C1.2 37.16,21.18 38.18,21.18 38.37,20.99 X1.2 | C2.2 38.37,19.28 38.37,20.93 38.43,20.99 X1.2 | X1.2 38.49,21.06 39.57,22.14 39.57,22.45 X1.4 39.13,22.96 39.13,23.02 38.88,23.28 35.26,23.28 33.99,22.01 U$1.P$78 33.92,22.01 U$1.P$74 | 33.73,15.98 32.97,15.98 C7.2 | 33.73,15.98 34.81,15.98 C8.2 | v33.73,16.42 33.73,15.98 | 30.3,22.01 30.56,22.26 30.56,22.9 U$1.P$B7 30.49,22.9 30.49,23.53 30.68,23.72 31.83,23.72 32.21,24.1 32.21,24.99 | U$1.P$F23 34.18,21.69 33.92,21.95 U$1.P$74 | U$1.P$83 30.3,19.59 30.3,20.74 U$1.P$74 | U$1.P$79 30.3,20.8 U$1.P$74 | 30.3,22.01 U$1.P$75 | 30.3,22.01 U$1.P$74 | U$1.P$88 31.51,18.39 31.51,19.53 U$1.P$74 | U$1.P$84 31.51,19.59 U$1.P$74 | U$1.P$89 32.65,18.39 31.57,18.39 U$1.P$88 | U$1.P$74 32.08,20.17 32.65,19.59 U$1.P$85 32.72,19.59 33.86,19.59 U$1.P$86 | U$1.P$80 31.51,20.8 U$1.P$74 | U$1.P$81 32.65,20.8 U$1.P$74
  Top 0.127: U$1.P$76 31.45,21.95 30.94,21.44 U$1.P$74 | U$1.P$77 32.72,21.95 33.29,21.37 U$1.P$74 | U$1.P$82 33.86,20.8 33.86,20.93 33.41,21.37 U$1.P$74 | IC2.B3 23.57,7.09 26.94,7.09 27.06,7.21 27.83,7.21 28.59,6.45 28.59,5.44 27.45,4.29 24.52,4.29 SW_ENT.1 24.52,4.36 24.52,4.55 23.25,5.82 20.71,5.82 20.52,6.01 20.52,6.13 C34.1 20.46,6.2 20.46,7.66 20.24,7.88 | 20.24,7.88 19.7,8.42 C27.1 19.7,8.48 19.7,9.5 U3.4 19.7,9.56 19.7,9.88 19,10.58 U3.9 | IC2.B1 22.49,7.09 22.17,7.4 22.17,9.31 C32.1 22.11,9.37 22.11,10.32 20.08,12.36 18.24,12.36 17.86,11.98 17.86,11.09 18.62,10.32 U3.9 | U3.1 18.24,9.56 18.24,9.88 18.94,10.58 U3.9 | U3.6 19.19,11.47 19.19,10.9 18.94,10.64 U3.9 | C30.1 10.81,5.82 12.27,5.82 13.47,4.61 13.47,4.29 SW_UP.1 13.54,4.29 19.82,4.29 20.11,4.58 | 20.11,4.58 20.14,4.61 20.14,4.67 20.4,4.93 C31.1 | 24.52,16.67 24.14,16.67 IC3.9 24.08,16.74 24.08,17.05 23.83,17.31 23.83,17.75 C19.2 | v23.06,14.96 23.06,14.39 R3.1 | v26.37,20.93 26.37,21.56 C18.1 | v24.52,16.04 24.52,16.67 | 24.52,16.67 IC3.8 | v20.27,4.48 20.21,4.55 20.14,4.55 20.11,4.58 | v20.27,7.91 20.24,7.88 | U$1.P$88 31.45,18.39 30.3,18.39 U$1.P$87 | C1-EP-DR.2 1.92,30.2 1.92,26.58 TP_GND.TP 1.98,26.58 4.78,26.58 6.55,24.8 7.19,24.8 7.95,24.04 J3.MP1 8.01,23.98 8.01,21.95 10.27,19.69 | 10.27,19.69 10.3,19.72 10.62,19.72 J3.8 10.68,19.79 11.76,19.79 12.65,20.68 15.06,20.68 | 10.27,19.69 10.05,19.47 10.05,15.53 10.3,15.28 10.62,15.28 J3.17 | 29.25,32.45 28.02,33.69 J4.SH1 | 29.25,32.45 29.29,32.42 31.76,32.42 TP_BAT_GND.TP 31.83,32.36 34.49,32.36 35.45,31.41 35.45,26.9 36.75,25.6 | 27.48,29.09 27.95,29.56 J4.SH3 28.02,29.63 29.22,30.84 29.22,32.42 29.25,32.45
  Top 0.127: 27.48,29.09 27.45,29.06 26.87,29.06 J4.A1_B12 | C5.2 27.32,22.52 27.32,23.21 27.57,23.47 C17.1 27.51,23.47 27.13,23.85 27.13,24.87 28.05,25.79 | C15.2 30.37,25.56 29.22,25.56 29.03,25.76 C14.2 28.91,25.82 28.08,25.82 28.05,25.79 | 28.05,25.79 27.51,26.33 27.51,29.06 27.48,29.09 | 12.08,31.41 11.57,31.91 11.57,32.87 R_TYPE_SEL.1 | 12.08,31.41 SJ1.1 12.14,31.34 12.14,31.02 12.87,30.3 | 13.86,30.33 12.9,30.33 12.87,30.3 | 13.86,30.33 14.24,30.33 C23.1 14.3,30.39 14.43,30.39 14.46,30.42 15.38,29.5 15.76,29.5 15.82,29.56 16.02,29.56 IC9.B1 16.08,29.56 16.08,29.18 IC9.C1 16.14,29.18 IC9.C2 16.52,29.18 16.84,29.18 IC9.C3 16.9,29.18 17.92,29.18 18.3,29.56 19.32,29.56 J4.SH4 | 12.87,30.3 12.4,29.82 R2_EP_DR.1 | 16.02,31.15 C24.1 14.9,32.34 14.9,33.2 12.7,33.2 12.08,32.58 12.08,31.41 | 18.94,27.34 18.24,27.34 18.05,27.15 C33.2 | 18.94,27.34 19.25,27.34 C43.2 19.32,27.34 20.78,27.34 C42.2 | v21.86,27.28 22.3,27.72 22.3,27.85 R2_USB.2 | 19.86,29.09 19.38,29.56 J4.SH4 | 19.86,29.09 19.89,29.06 20.46,29.06 J4.A12_B1 | 18.94,27.34 18.94,28.17 19.86,29.09 | J4.SH2 19.38,33.69 19.38,29.63 J4.SH4 | J3.MP2 8.01,10.96 8.01,9.05 9.16,7.91 EPD_C12.1 | EPD_C12.1 9.16,7.97 11.13,7.97 EPD_C11.1 11.19,8.04 13.03,8.04 14.94,9.94 EPD_C10.1 15,10.01 15,11.79 EPD_C9.1 15.06,11.85 15.06,13.75 EPD_C8.1 15.13,13.82 15.13,15.85 EPD_C7.1 15.06,15.91 15.06,18.01 EPD_C6.1 15,18.01 15,19.98 EPD_C5.1 15.06,20.04 15.06,20.68 | D4.1 6.49,3.91 6.49,4.04 9.16,6.71 9.16,7.85 EPD_C12.1 | D3.2 21.03,23.6 21.03,23.34 19.95,22.26 18.68,22.26 C39.2 15.06,22.2 | 23.45,22.14 23.45,21.31 IC1.D2 23.38,21.25
  Top 0.127: 23.45,22.14 R9.1 23.45,22.2 24.71,23.47 24.71,26.26 24.21,26.77 24.21,27.85 R1_USB.1 | C38.1 | 21.03,23.28 D3.2 | 22.49,21.95 C38.1 | 15.54,26.74 15.19,26.39 15.19,23.95 EPD_C2.1 15.05,22.2 15.06,22.2 | 15.54,26.74 15.76,26.96 15.76,27.22 C25.2 | 15.06,22.2 15.06,22.14 EPD_C1.1 | 15.06,20.68 15.06,22.07 EPD_C1.1 | 15.06,22.2 EPD_C1.1 | 13.86,30.33 13.86,28.42 15.54,26.74 | C38.1 22.6,21.84 v22.6,21.3 | v23.3,22.8 23.45,22.66 23.45,22.14 | D3.2 21.08,22.82 21.2,22.7 v21.3,22.7 | C38.1 21.68,21.88 v21.5,21.7 21.3,21.5 21.3,20.6 21.32,20.59 C37.1
  Bottom 0.127: U$1.P$89 32.72,18.33 32.78,18.26 33.73,18.26 U$1.P$90 33.86,18.33 33.73,18.2 v33.73,16.42 33.29,15.98 31.73,15.98 31.6,15.85 31.6,14.8 31.5,14.7 v31.2,14.7 | 26.84,18.29 26.87,18.33 30.24,18.33 U$1.P$87 | 26.84,18.29 24.56,16.01 | 24.56,16.01 23.51,14.96 v23.06,14.96 20.27,12.17 v20.27,7.91 v20.27,4.48 | v26.37,20.93 26.37,18.77 26.84,18.29 | v24.52,16.04 24.56,16.01 | J4.SH4 19.38,29.56 21.67,27.28 v21.86,27.28 24.65,27.28 26.94,29.56 27.95,29.56 J4.SH3 | v22.6,21.3 23,21.7 23,22.8 v23.3,22.8 | v21.3,22.7 21.5,22.5 v21.5,21.7
  pour Top: 6.26,11.76 6.24,11.74 6.21,11.72 6.19,11.72 6.16,11.74 5.77,12.12 -1.32,12.12 -1.32,0.53 0.23,-1.02 45.87,-1.02 49.12,2.23 49.12,29.82 48.94,29.64 48.91,29.62 44.59,29.62 44.56,29.64 44.27,29.93 36.69,29.93 36.66,29.94 36.54,30.06 36.52,30.09 36.52,35.17 35.5,36.19 33.64,34.34 33.61,34.33 0.59,34.33 0.56,34.34 0.55,34.34 -1.52,32.27 -1.52,24.53 -0.67,23.68 6.11,23.68 6.14,23.66 6.26,23.54 6.27,23.51 6.27,11.79
  pour Bottom: -0.44,9.74 -0.43,9.71 -0.43,-1.22 0.26,-0.54 0.29,-0.52 47.37,-0.52 48.33,0.43 48.33,29.62 37.39,29.62 37.36,29.64 36.64,30.36 36.62,30.39 36.62,30.41 36.64,30.44 36.73,30.53 36.73,35.17 36.67,35.23 1.98,35.23 1.98,35.19 1.96,35.16 1.94,35.14 1.91,35.12 1.89,35.12 1.86,35.14 1.37,35.62 -0.02,35.62 -0.02,26.99 -0.04,26.96 -2.49,24.5 -1.87,23.88 6.01,23.88 6.04,23.86 6.06,23.84 6.07,23.81 6.07,23.79 6.06,23.76 5.57,23.27 5.57,11.69 5.56,11.66 4.64,10.74 4.61,10.72 -1.42,10.72
IMU_INT1
  Top 0.127: U$1.P$N1 28.48,19.93 27.83,19.67 26.08,17.91 26.08,16.51 25.16,15.6 IC3.5
IMU_INT2  (via drill 0.1, 0.3)
  Top 0.15: IC3.6 25.2,16.15 25.55,16.5 v25.6,16.5 | v27.6,17.8 27.9,18.1 27.9,18.8 28.78,19.68 U$1.P$P2
  Bottom 0.15: v25.6,16.5 26.5,17.4 27.2,17.4 v27.6,17.8
LX1  (via drill 0.3)
  Top 0.127: IC9.B2 16.52,29.56 16.84,29.56 IC9.B3 16.9,29.56 17.29,29.56 v17.35,29.63 | v16.02,26.58 16.02,25.44 16.27,25.18 L7.1
  Bottom 0.127: v17.35,29.63 16.52,29.63 15.76,30.39 15.38,30.39 15.13,30.14 15.13,27.47 v16.02,26.58
LX2
  Top 0.127: IC9.D2 16.52,28.8 16.84,28.8 IC9.D3 16.9,28.74 17.03,28.74 17.48,28.3 17.48,26.07 18.36,25.18 L7.2
N$1
  Top 0.127: U$1.P$A23 34.87,23.47 35.06,23.47 35.13,23.53 39.76,23.53 40.27,23.02 40.27,21.69 39.64,21.06 X1.3 39.57,20.99 39.57,20.87 38.88,20.17 38.88,19.28 C2.1
N$2
  Top 0.127: 37,22.42 37.1,22.33 37.1,21.75 C1.1 | 37,22.42 36.52,22.9 35.38,22.9 U$1.P$B24 | X1.1 38.43,22.45 37.03,22.45 37,22.42
N$3  (via drill 0.3)
  Top 0.127: v35.26,21.44 35,21.18 34.87,21.18 U$1.P$H23 | v36.46,26.58 37.16,26.58 C3.1 37.22,26.58 37.22,28.3 L1.1
  Bottom 0.127: v35.26,21.44 35.26,25.37 v36.46,26.58
N$4
  Top 0.127: U$1.P$B3 29.6,22.96 29.6,24.55 30.11,25.06 30.81,25.06 30.94,25.18 30.94,25.95 29.92,26.96 29.16,26.96 29.03,27.09 29.03,28.42 29.22,28.61 34.05,28.61 L2.1
N$5
  Top 0.127: L3.1 30.43,29.82 33.16,29.82 34.05,30.71 L2.2
N$6
  Top 0.127: C22.1 40.53,26.64 39.64,26.64 C4.1 39.57,26.71 39.57,28.1 39.38,28.3 L1.2 39.32,28.36 38.3,29.37 38.3,31.72 ANT1.1
N$7
  Top 0.076: U$1.P$AC5 30.07,16.1 C20.1
  Top 0.127: 30.05,17.37 U$1.P$AC5 | 29.69,16.05 C20.1
N$8
  Top 0.127: U$1.P$C1 28.78,22.45 27.95,22.45 C5.1
N$9  (via drill 0.3)
  Top 0.127: U$1.P$D2 29.29,22.2 29.29,22.77 29.22,22.83 29.22,23.34 28.46,24.1 27.64,24.1 C17.2 27.57,24.17 v27.57,24.68 | v24.27,26.07 24.27,25.25 X2.2
  Bottom 0.127: v27.57,24.68 25.98,24.68 24.59,26.07 v24.27,26.07
N$10
  Top 0.127: U$1.P$F2 29.29,21.69 29.03,21.69 28.65,22.07 26.49,22.07 26.37,22.2 C18.2 26.37,22.26 26.37,24.74 X2.1
N$11
  Top 0.127: U$1.P$A18 33.29,23.47 33.29,23.6 32.72,24.17 C13.1
N$12
  Top 0.127: IC9.D1 16.02,28.8 15.25,28.8 15,29.06 14.87,29.06 R4.2
N$13
  Top 0.127: IC9.E1 16.02,28.42 15.06,28.42 14.94,28.55 R2.2
N$14
  Top 0.127: IC1.D1 23.89,21.31 23.89,22.07 23.95,22.14 R9.2
N$15
  Top 0.127: R3.2 23.64,14.39 23.64,15.09 IC3.1
N$16
  Top 0.127: C2-EP-DR1.1 0.96,7.15 0.96,5.05 2.11,3.91 2.93,3.91 D4.2 3,3.85 3.38,3.47 3.38,2.13 D2.1
N$17  (via drill 0.3)
  Top 0.127: C2-EP-DR1.2 0.96,8.86 3.32,8.86 4.2,9.75 L5.1 4.27,9.82 6.87,9.82 v7.51,10.45 | v10.94,26.39 12.08,26.39 Q3.3 | v10.3,27.02 9.16,27.02 D5.2
  Bottom 0.127: v10.3,27.02 v10.94,26.39 10.87,26.39 9.16,24.68 9.16,14.96 7.51,13.31 v7.51,10.45
N$18
  Top 0.127: C34.2 20.91,6.2 22.62,6.2 23,6.58 IC2.C2
N$19
  Top 0.127: U$1.P$N24 35.38,19.98 35.83,19.98 C9.1
N$20
  Top 0.127: C32.2 22.55,9.31 22.55,8.04 23,7.59 IC2.A2
N$21
  Top 0.127: R1_USB.2 24.78,27.91 24.78,28.87 24.91,28.99 J4.A5
N$22
  Top 0.127: R_TYPE_SEL.2 10.94,32.87 10.94,31.72 10.62,31.41 SJ1.2 10.62,31.34 11.13,30.84 11.13,29.69 R1_EP_DR.1
N$23
  Top 0.127: C27.2 19.32,8.48 19.32,9.44 19.25,9.5 U3.3
N$26
  Top 0.127: R2_USB.1 21.79,27.91 21.79,28.93 21.86,28.99 J4.B5
N$27
  Top 0.127: J3.4 10.68,21.75 11.44,21.75 13.41,23.72 EPD_C2.2
N$28
  Top 0.127: J3.5 10.68,21.31 12.65,21.31 13.41,22.07 EPD_C1.2
N$35
  Top 0.127: J3.18 10.68,14.77 10.94,14.77 13.35,17.18 13.35,17.95 EPD_C6.2
N$36
  Top 0.127: J3.19 10.68,14.26 11.89,14.26 13.47,15.85 EPD_C7.2
N$38
  Top 0.127: J3.20 10.68,13.75 13.47,13.75 EPD_C8.2
N$40
  Top 0.127: J3.22 10.68,12.74 10.94,12.74 12.59,11.09 12.59,10.77 EPD_C10.2
N$42
  Top 0.127: J3.24 10.62,11.72 10.62,10.96 9.22,9.56 EPD_C12.2
OUT+
  Top 0.127: IC2.A3 23.57,7.59 25.86,7.59 27.13,8.86 TP_OP.TP
OUT-
  Top 0.127: IC2.C3 23.57,6.58 26.81,6.58 27.38,6.01 TP_ON.TP
P0.13/1.5D  (via drill 0.3)
  Top 0.127: 10.74,5.05 10.74,4.29 SW_UP.2 | 10.74,5.05 10.74,5.44 C30.2 | v9.16,4.42 9.35,4.23 9.35,3.91 R5.1 | 10.74,5.05 v10.05,5.05
  Bottom 0.127: v9.16,4.42 9.41,4.42 v10.05,5.05
P0.14/1.5D
  Top 0.127: SW_ENT.2 21.67,4.29 21.03,4.93 20.84,4.93 C31.2 20.78,4.99 20.78,5.12 20.59,5.31 19.76,5.31 R8.1
P1.01/1.6C
  Top 0.127: R_PWR_EPD.1 8.65,31.79 8.33,31.79 7.63,31.09 Q1.1
P1.02/1.6C
  Top 0.127: R7.1 32.02,5.37 32.14,5.5 32.46,5.5 C29.2 32.46,5.44 32.46,4.42 32.59,4.29 SW_DN.2
PMIC_INT  (via drill 0.1, 0.3)
  Top 0.15: v25.9,19.6 v27.1,19.6 | IC1.A1 23.83,19.96 23.63,19.76 v23.63,19.56 | U$1.P$T2 v29.32,18.78
  Bottom 0.15: v23.63,19.56 24.23,20.16 25.34,20.16 v25.9,19.6 | v27.1,19.6 28.1,19.6 28.5,19.2 28.9,19.2 v29.32,18.78
PREVGH  (via drill 0.3)
  Top 0.127: EPD_C11.2 11.19,9.63 11.19,11.98 10.94,12.23 10.68,12.23 J3.23 10.62,12.29 10.3,12.29 v8.08,14.52 | v8.08,24.55 5.66,26.96 D5.1
  Bottom 0.127: v8.08,14.52 v8.08,24.55
PREVGL  (via drill 0.3)
  Top 0.127: J3.21 10.68,13.25 11.95,13.25 13.35,11.85 EPD_C9.2 13.35,11.79 13.03,11.47 v13.03,10.96 | v6.93,3.09 D2.2
  Bottom 0.127: v6.93,3.09 6.93,4.86 v13.03,10.96
RESE
  Top 0.127: R1_EP_DR.2 10.68,29.63 10.68,29.25 11.44,28.49 Q3.2 11.44,28.42 11.44,27.53 10.05,26.14 10.05,22.52 10.3,22.26 10.62,22.26 J3.3
RESET  (via drill 0.3)
  Top 0.127: v43.83,11.34 44.27,11.79 44.46,11.79 J2.6 | 31.9,12.04 31.57,12.04 31.19,11.66 TP_RESET.TP | 31.9,12.04 v32.52,12.04 | U$1.P$AC13 32.07,12.83 32.2,12.7 32.2,12.34 31.9,12.04
  Bottom 0.127: v43.83,11.34 41.73,11.34 41.03,12.04 v32.52,12.04
SCL/1.4C
  Top 0.127: IC2.C1 22.49,6.64 20.08,9.05 20.08,11.98 19.95,12.1 19,12.1 18.75,11.85 18.75,11.53 U3.7
SCL/2.4C  (via drill 0.1, 0.3)
  Top 0.127: IC1.B1 23.89,20.42 24.34,19.97 v24.34,19.62 24.34,19.54 24.02,19.21 R17.2 | v23,15.6 23.51,15.6 IC3.12 | v20.65,15.6 19.57,14.52 TP_SCL.TP | v14.3,29.63 14.3,29.12 R4.1 | v25.7,19 26.6,19 v26.7,19.1 | U$1.P$M2 27.92,20.18 v27.72,19.98
  Bottom 0.127: v14.3,29.63 14.3,21.95 v20.65,15.6 v23,15.6 24.34,16.94 24.34,19.2 | 24.34,19.2 v24.34,19.62 | 24.34,19.2 25.4,19.2 25.6,19 v25.7,19 | v26.7,19.1 26.7,20.1 26.8,20.2 27.5,20.2 v27.72,19.98
SDA/1.4C  (via drill 0.1, 0.35)
  Top 0.152: v20.5,13.1 20.8,13.1 v21.7,12.2 | IC2.B2 23.03,7.18 v23.23,7.38 | U3.8 18.22,11.82 v18.42,12.03
  Bottom 0.152: v18.42,12.03 18.42,12.32 19.2,13.1 v20.5,13.1 | v21.7,12.2 22.5,11.4 22.5,8.6 23.2,7.9 23.2,7.41 v23.23,7.38
SDA/2.4C  (via drill 0.3)
  Top 0.127: v24.08,14.26 24.08,15.09 IC3.2 | TP_SDA.TP 23.76,11.79 24.08,12.1 v24.08,13.12 23.06,13.12 22.11,14.07 22.11,18.45 22.62,18.96 R18.2 22.68,19.02 v22.68,19.59 | v24.33,20.8 23.89,20.8 IC1.C1 | U$1.P$L1 28.77,20.48 25.7,20.48 v25.6,20.58 | v18.62,22.9 17.22,24.3 17.22,26.2 16.97,26.45 16.84,26.45 16.4,26.9 16.4,27.6 16.2,27.79 15.06,27.79 14.55,28.3 14.55,28.36 14.36,28.55 R2.1
  Bottom 0.127: v24.08,13.12 v24.08,14.26 | v25.6,20.58 24.55,20.58 v24.33,20.8 23.89,20.8 v22.68,19.59 22.68,19.66 19.44,22.9 v18.62,22.9
SWDCLK  (via drill 0.3)
  Top 0.127: U$1.P$AA24 35.38,17.95 v39.83,17.95 39.95,17.95 41.73,19.72 42.75,19.72 TP_SWDCLK.TP | v42.43,12.61 43.19,11.85 J2.4
  Bottom 0.127: v42.43,12.61 42.43,13.25 42.18,13.5 42.18,15.6 v39.83,17.95
SWDIO
  Top 0.127: U$1.P$AC24 35.38,17.37 41.03,17.37 TP_SWDIO.TP 41.1,17.31 42.18,16.23 42.18,13.18 41.99,12.99 41.99,11.85 J2.2
SWO  (via drill 0.3)
  Top 0.127: v34.37,16.42 34.37,16.93 U$1.P$AD22 | v33.03,15.47 33.03,15.21 33.86,14.39 TP_SWO.TP
  Bottom 0.127: v34.37,16.42 33.41,15.47 v33.03,15.47
VBAT/1.2A
  Top 0.3: U3.2 18.68,9.5 18.68,8.29 17.03,6.64 TP_VBAT.TP
VBAT/2.5C
  Top 0.127: C37.2 22.19,20.95 22.29,20.86 IC1.C2
VBUS/1.5D
  Top 0.3: 20.78,27.79 19.32,27.79 C43.1 | 20.78,27.79 C42.1 | 20.84,27.91 20.84,28.1 21.22,28.49 21.22,28.99 J4.A9_B4 21.35,29.12 21.35,29.56 22.24,30.45 25.16,30.45 26.05,29.56 26.05,29.06 J4.A4_B9 | 20.84,27.91 20.78,27.79 | D3.5 21.09,26.14 21.09,27.02 21.22,27.15 21.22,27.66 20.97,27.91 20.84,27.91
VBUS/2.6D  (via drill 0.3)
  Top 0.127: C38.2 21.16,22.25 20.6,21.7 v20.6,20.3 | v20.7,18.8 21.73,18.8
  Top 0.3: v22.17,13.37 21.73,13.82 21.73,18.8 21.73,19.3 22.53,20.1 22.94,20.1 23,20.04 23.38,20.04 IC1.A2 | 28.71,15.72 v28.14,15.15 | 28.71,15.72 C21.1 | U$1.P$AD2 28.71,16.32 28.71,15.72
  Bottom 0.127: v20.6,20.3 20.6,18.9 v20.7,18.8
  Bottom 0.3: v22.17,13.37 22.43,13.37 24.21,15.15 v28.14,15.15
VREG  (via drill 0.3)
  Top 0.127: C23.2 14.76,30.76 v15.57,29.95
  Top 0.15: 20.02,19.7 21.6,19.7 22.4,20.5 23.39,20.5
  Top 0.3: 16.46,30.01 16.08,30.01 | 16.08,30.01 IC9.A1 | 16.46,30.01 IC9.A2 | 16.46,30.01 16.84,30.01 | 16.84,30.01 IC9.A3 | 16.84,30.01 16.9,30.14 16.9,30.96 17.09,31.15 C24.2 17.09,31.34 16.9,31.53 16.9,33.38 TP_VREG.TP | v17.92,21.75 17.98,21.75 18.62,21.12 C39.1 20.02,19.7 | v15.57,29.95 15.82,29.95 15.95,30.07 16.08,30.01 | 23.39,20.5 IC1.B2
  Bottom 0.3: v17.92,21.75 17.92,26.26 15.57,28.61 v15.57,29.95